# Altium PCB DTMF.PcbDoc
Units mm, origin at the board's own origin, x right, y up, seen from the top; angles counter-clockwise.
Board outline 100.25 x 50.25 mm, 2 copper layers (Top Layer, Bottom Layer); 17 components, 15 nets, 47 pads, 4 vias.
Unrouted connection lines stored in the file: 2.
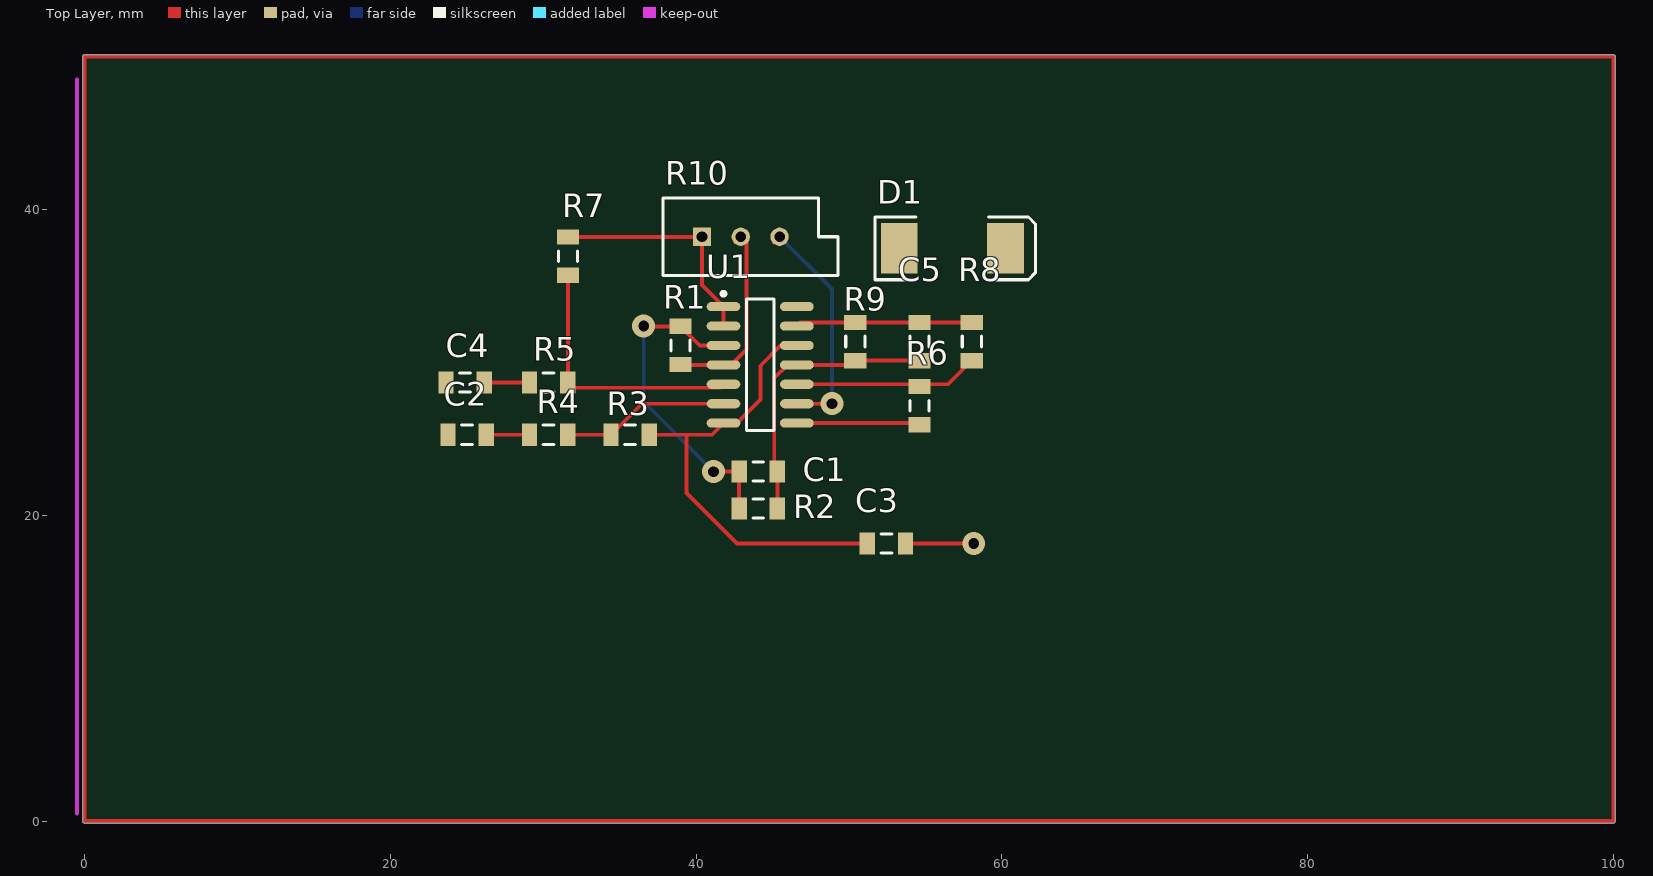
[diagram p0: Top Layer view]
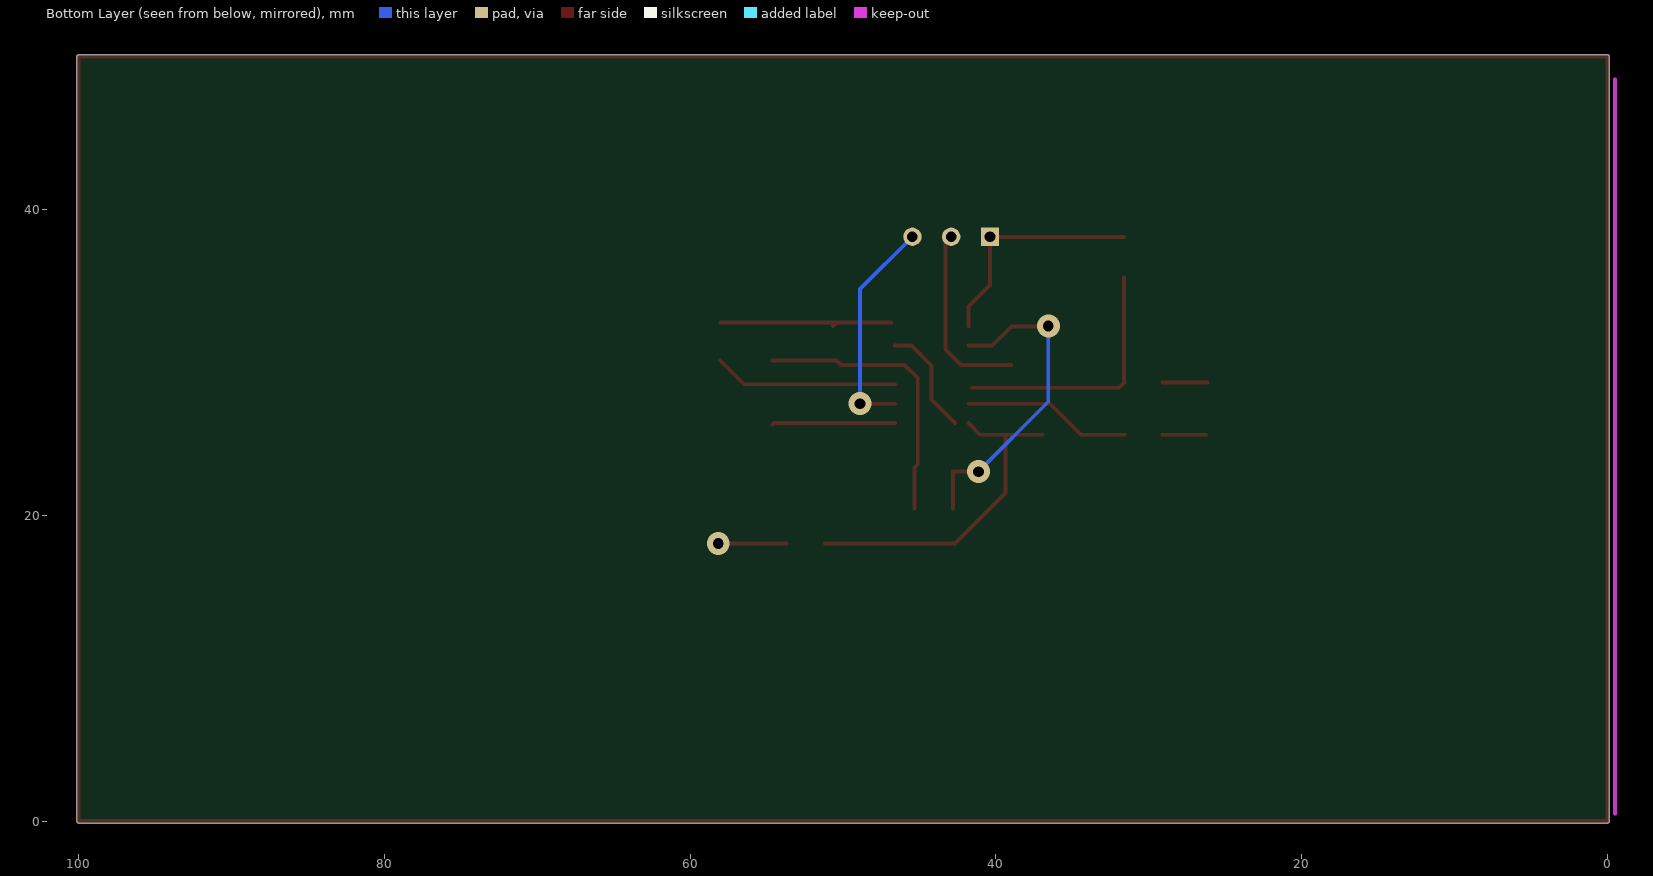
[diagram p1: Bottom Layer view, seen from below]

## Layer stack, top to bottom
Top Solder: solder mask 0.0102, Solder Resist, Dk 3.5
Top Layer: signal copper 0.0356
Dielectric 1: dielectric 0.32, FR-4, Dk 4.8
Bottom Layer: signal copper 0.0356
Bottom Solder: solder mask 0.0102, Solder Resist, Dk 3.5

## Board outline
-0.11,0.064 cw(c0,0.127) -0.127,0.127 -0.127,50 cw(c0,50) 0,50.127 100,50.127 cw(c100,50) 100.127,50 100.127,0 cw(c100,0) 100,-0.127 0,-0.127 cw(c0,0)

## Design rules (kind name [scope] priority, off if disabled: settings)
Clearance [All] p1: gap=0.2
PolygonConnect [All] p1: connectstyle=Relief reliefconductorwidth=0.254 reliefentries=4 polygonreliefangle="90 Angle" airgapwidth=0.254
RoutingVias [All] p1: holewidth=0.711 width=1.27 viastyle="Through Hole" minholewidth=0.711 minwidth=1.27 maxholewidth=0.711 maxwidth=1.27
SolderMaskExpansion [All] p1: expansion=0.102
Width [All] p1: maxlimit=0.254 minlimit=0.254 preferedwidth=0.254
29 further rules are at their usual default settings.

## Components (designator, comment, footprint, x,y, rotation, side; value= is the part's Value field where it differs from the comment)
C1 "Cap" 0805_RES 44.069,22.86 r0 top
C2 "Cap" 0805_RES 25.019,25.273 r0 top
C3 "Cap" 0805_RES 52.451,18.161 r0 top
C4 "10nF" 0805_RES 24.892,28.702 r0 top
C5 "Cap" 0805_RES 54.61,31.369 r90 top
D1 "Diode" SMC 56.769,37.465 r0 top
R1 "Res1" 0805_RES 38.989,31.115 r270 top
R2 "Res1" 0805_RES 44.069,20.447 r180 top
R3 "Res1" 0805_RES 35.687,25.273 r0 top
R4 "Res1" 0805_RES 30.353,25.273 r0 top
R5 "10K" 0805_RES 30.353,28.702 r0 top
R6 "Res1" 0805_RES 54.61,27.178 r270 top
R7 "Res1" 0805_RES 31.623,36.957 r270 top
R8 "Res1" 0805_RES 58.039,31.369 r270 top
R9 "Res1" 0805_RES 50.419,31.369 r90 top
R10 "RPot" VR5 42.926,38.227 r0 top
U1 "LM324AD" SOIC127P600X175-14N 44.196,29.845 r0 top

## Footprints (in the part's own frame and the unit in brackets; to place one, negate y for a bottom-side part, rotate by r counter-clockwise, add the part's x,y. Pads: shape width x height; smd on the part's side, far side on the other; paste and mask are expansions set on the pad)
0805_RES [mm] "Chip Resistor, 2-Leads, Body 2.00x1.25mm, IPC Low Density"
  rect 1x1.45 smd: 1(-1.25,0) 2(1.25,0)
  silkscreen extent -0.35,-0.63 0.35,0.63, body extent -1.1,-0.7 1.1,0.7, height 0.95
SMC [mm] "DO-214-AB/SMC; 2 C-Bend Leads; Body 7.9 x 5.9 mm, inc. leads (LxW)"
  rect 2.4x3.3 smd: 1(-3.475,0) 2(3.475,0)
  silkscreen extent -5.07,-2.05 5.43,2.05
SOIC127P600X175-14N [mm] "SOIC, 14-Leads, Body 8.65x3.90mm, Pitch 1.27mm, IPC Medium Density"
  oval 2.2x0.6 smd: 1(-2.4,3.81) 2(-2.4,2.54) 3(-2.4,1.27) 4(-2.4,0) 5(-2.4,-1.27) 6(-2.4,-2.54) 7(-2.4,-3.81) 8(2.4,-3.81) 9(2.4,-2.54) 10(2.4,-1.27) 11(2.4,0) 12(2.4,1.27) 13(2.4,2.54) 14(2.4,3.81)
  silkscreen extent -2.52,-4.3 0.9,4.78, body extent -2,-4.3 2,4.3, height 1.75
VR5 [mm] "Thru-Hole; 3 Leads"
  rect 1.2x1.2 hole 0.7: 1(-2.54,0)
  round 1.2 hole 0.7: 2(0,0) 3(2.54,0)
  silkscreen extent -5.08,-2.54 6.35,2.54

## Part data
C1 C2 C3 C5: "Capacitor"
C4: library part Cap, "Capacitor"
D1: "Default Diode"
R1 R2 R3 R4 R6 R7 R8 R9: "Resistor"
R5: library part Res1, "Resistor"
R10: "Potentiometer"
U1: "Quad Low-Power Operational Amplifier"

## Via types
v1: diameter 1.5, hole 0.7, Top Layer to Bottom Layer, tented both sides, 4 vias

## Nets (pads, with @x,y where several pads share a name; then routed paths per layer and width w, separated by ;. In a path a pad name is that pad's centre, name@x,y a point inside that pad or via, vN(x,y) a via of type N, cw(c..) or ccw(c..) an arc to the next point about the centre after c; other vN are vias at no path point)
DATA_IN: C3.2 | length 4.5
  Top Layer w0.254: C3.2 v1(58.166,18.161)
GND: C1.2 C5.1 R2.1 R9.1 U1.11 | length 18.6
  Top Layer w0.254: R2.1 45.319,23.114 45.115,23.318 45.115,28.986 45.974,29.845 U1.11 50.145,29.845 R9.1 C5.1
NetC1_1: C1.1 R1.1 R2.2 U1.3 | length 20.7
  Top Layer w0.254: v1@37.104,32.365 R1.1 40.239,31.115 U1.3 ; v1(41.148,22.86) C1.1 R2.2
  Bottom Layer w0.254: v1(36.576,32.385) 36.576,27.432 v1(41.148,22.86)
NetC2_2: C2.2 R4.1 | length 2.8
  Top Layer w0.254: C2.2 R4.1
NetC3_1: C3.1 R3.2 U1.7 U1.12 | length 29.5
  Top Layer w0.254: R3.2 39.37,25.273 ; U1.7 41.034,25.273 39.37,25.273 ; U1.7@42.672,26.035 44.207,27.57 44.207,29.785 45.537,31.115 U1.12 ; C3.1 42.672,18.161 39.37,21.463 39.37,25.273
NetC4_2: C4.2 R5.1 | length 3
  Top Layer w0.254: C4.2 R5.1
NetC5_2: C5.2 D1.2 R8.1 R9.2 U1.13 | length 11.5
  Top Layer w0.254: U1.13@46.83,32.619 R9.2 ; R9.2@50.653,32.385 R9.2 ; R8.1 C5.2 R9.2
NetD1_1: D1.1 U1.14
NetR3_1: R3.1 R4.2 U1.6 | length 11
  Top Layer w0.254: R4.2 R3.1 36.469,27.305 U1.6
NetR5_2: R5.2 R7.2 U1.5 | length 17
  Top Layer w0.254: R7.2@31.623,35.58 31.623,28.722 R5.2 31.956,28.349 U1.5@41.57,28.349
NetR6_1: R6.1 R8.2 U1.10 | length 12.1
  Top Layer w0.254: U1.10 56.495,28.575 R8.2
NetR10_3: R10.3 U1.9 | length 14.9
  Top Layer w0.254: R10.3@45.085,37.846 R10.3 ; U1.9 v1@48.641,27.305
  Bottom Layer w0.254: R10.3 48.895,34.798 v1(48.895,27.305)
PTT: R6.2 U1.8 | length 8.1
  Top Layer w0.254: U1.8 54.503,26.035 R6.2
VCC: R1.2 R10.2 U1.4 | length 12.2
  Top Layer w0.254: R1.2@39.009,29.845 U1.4 42.291,29.845 43.307,30.861 43.307,37.846 R10.2
VREF: R7.1 R10.1 U1.1 U1.2 | length 15.2
  Top Layer w0.254: R7.1 40.366,38.207 R10.1 40.386,35.065 U1.1 U1.2
pads on no net: C2.1 C4.1
copper on no net: | length 299.9
  Top Layer w0.254: 0,0 100,0 100,50 0,50 0,0.127

## Keep-outs
Keep-Out Layer:
  lines w0.254: -0.508,0.508 -0.508,48.514